# EAGLE board DIY-e-bike-thumb-throttle EAGLE v1 (EAGLE 7.6.0)
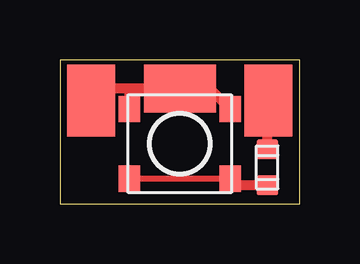
[diagram p0: board, top side]

Size 10 x 6 mm. Coordinates in mm from the lower left corner, seen from the top.
Outline: 0,0 10,0 10,6 0,6 0,0
Copper layers (1*16): Top 0.035mm / dielectric 1.5mm / Bottom 0.035mm
Design rules "Albert 5mil": minimum track width 5mil, minimum drill 0.3mm, track to track 5mil, track to pad 5mil, pad to pad 5mil, via to via 5mil, smd to smd 5mil, copper to edge 10mil, drill to drill 8mil, minimum pad ring 8.5mil, minimum via ring 6mil, stop-mask expansion 4mil, vias tented up to drill 25mil, thermal gap 10mil

## Footprints (pad centres in the part's own frame; a part is rotated, then mirrored left to right if it is on the bottom)
PAD-1.5X4.5 = smd 2 x 3: P$1 0,0
0603-SMALL = smd 0.9 x 0.8: 1 0,0.75; 2 0,-0.75
TACTILE_SWITCH_SMD-2 = smd 0.9 x 1.1: 1 2.1,1.45; 2 2.1,-1.45; 3 -2.1,-1.45; 4 -2.1,1.45

## Placement (x,y rotation side)
J1  [PAD-1.5X4.5]  1.3,4.3 0 top
J2  [PAD-1.5X4.5]  5,4.8 270 top
J3  [PAD-1.5X4.5]  8.7,4.3 0 top
R1  [0603-SMALL]  8.65,1.52 180 top
SW1  EVQ-P6DB35  [TACTILE_SWITCH_SMD-2]  5,2.5 0 top

## Library data of the parts
J1-J3 = SparkFun-Connectors
R1 SW1 = ALBERT

## Nets
N$1: J3.P$1 R1.2
N$2: R1.1 SW1.2 SW1.3
N$3: J1.P$1 J2.P$1 SW1.1 SW1.4

## Tracks (layer width: path | path; a pad name or v marks a point on that pad's centre or on a via)
N$1
  Top 0.406: R1.2 8.65,4.25 J3.P$1
N$2
  Top 0.254: SW1.3 SW1.2
  Top 0.406: R1.1 7.38,0.77 SW1.2
N$3
  Top 0.406: SW1.1 6.25,4.8 J2.P$1 3,4.8 | 3,4.8 1.8,4.8 J1.P$1 | SW1.4 2.9,4.7 3,4.8

## Text on the board
bNames: Throttle / v1